# Altium PCB AMDDSP.PcbDoc (part 2 of 3)
Units mil, origin at the board's own origin, x right, y up, seen from the top; angles counter-clockwise.
Board outline 4736.22 x 5330.71 mil, 4 copper layers (Top Layer, GND, PWR, Bottom Layer); 286 components, 168 nets, 1027 pads, 408 vias.
Unrouted connection lines stored in the file: 126.
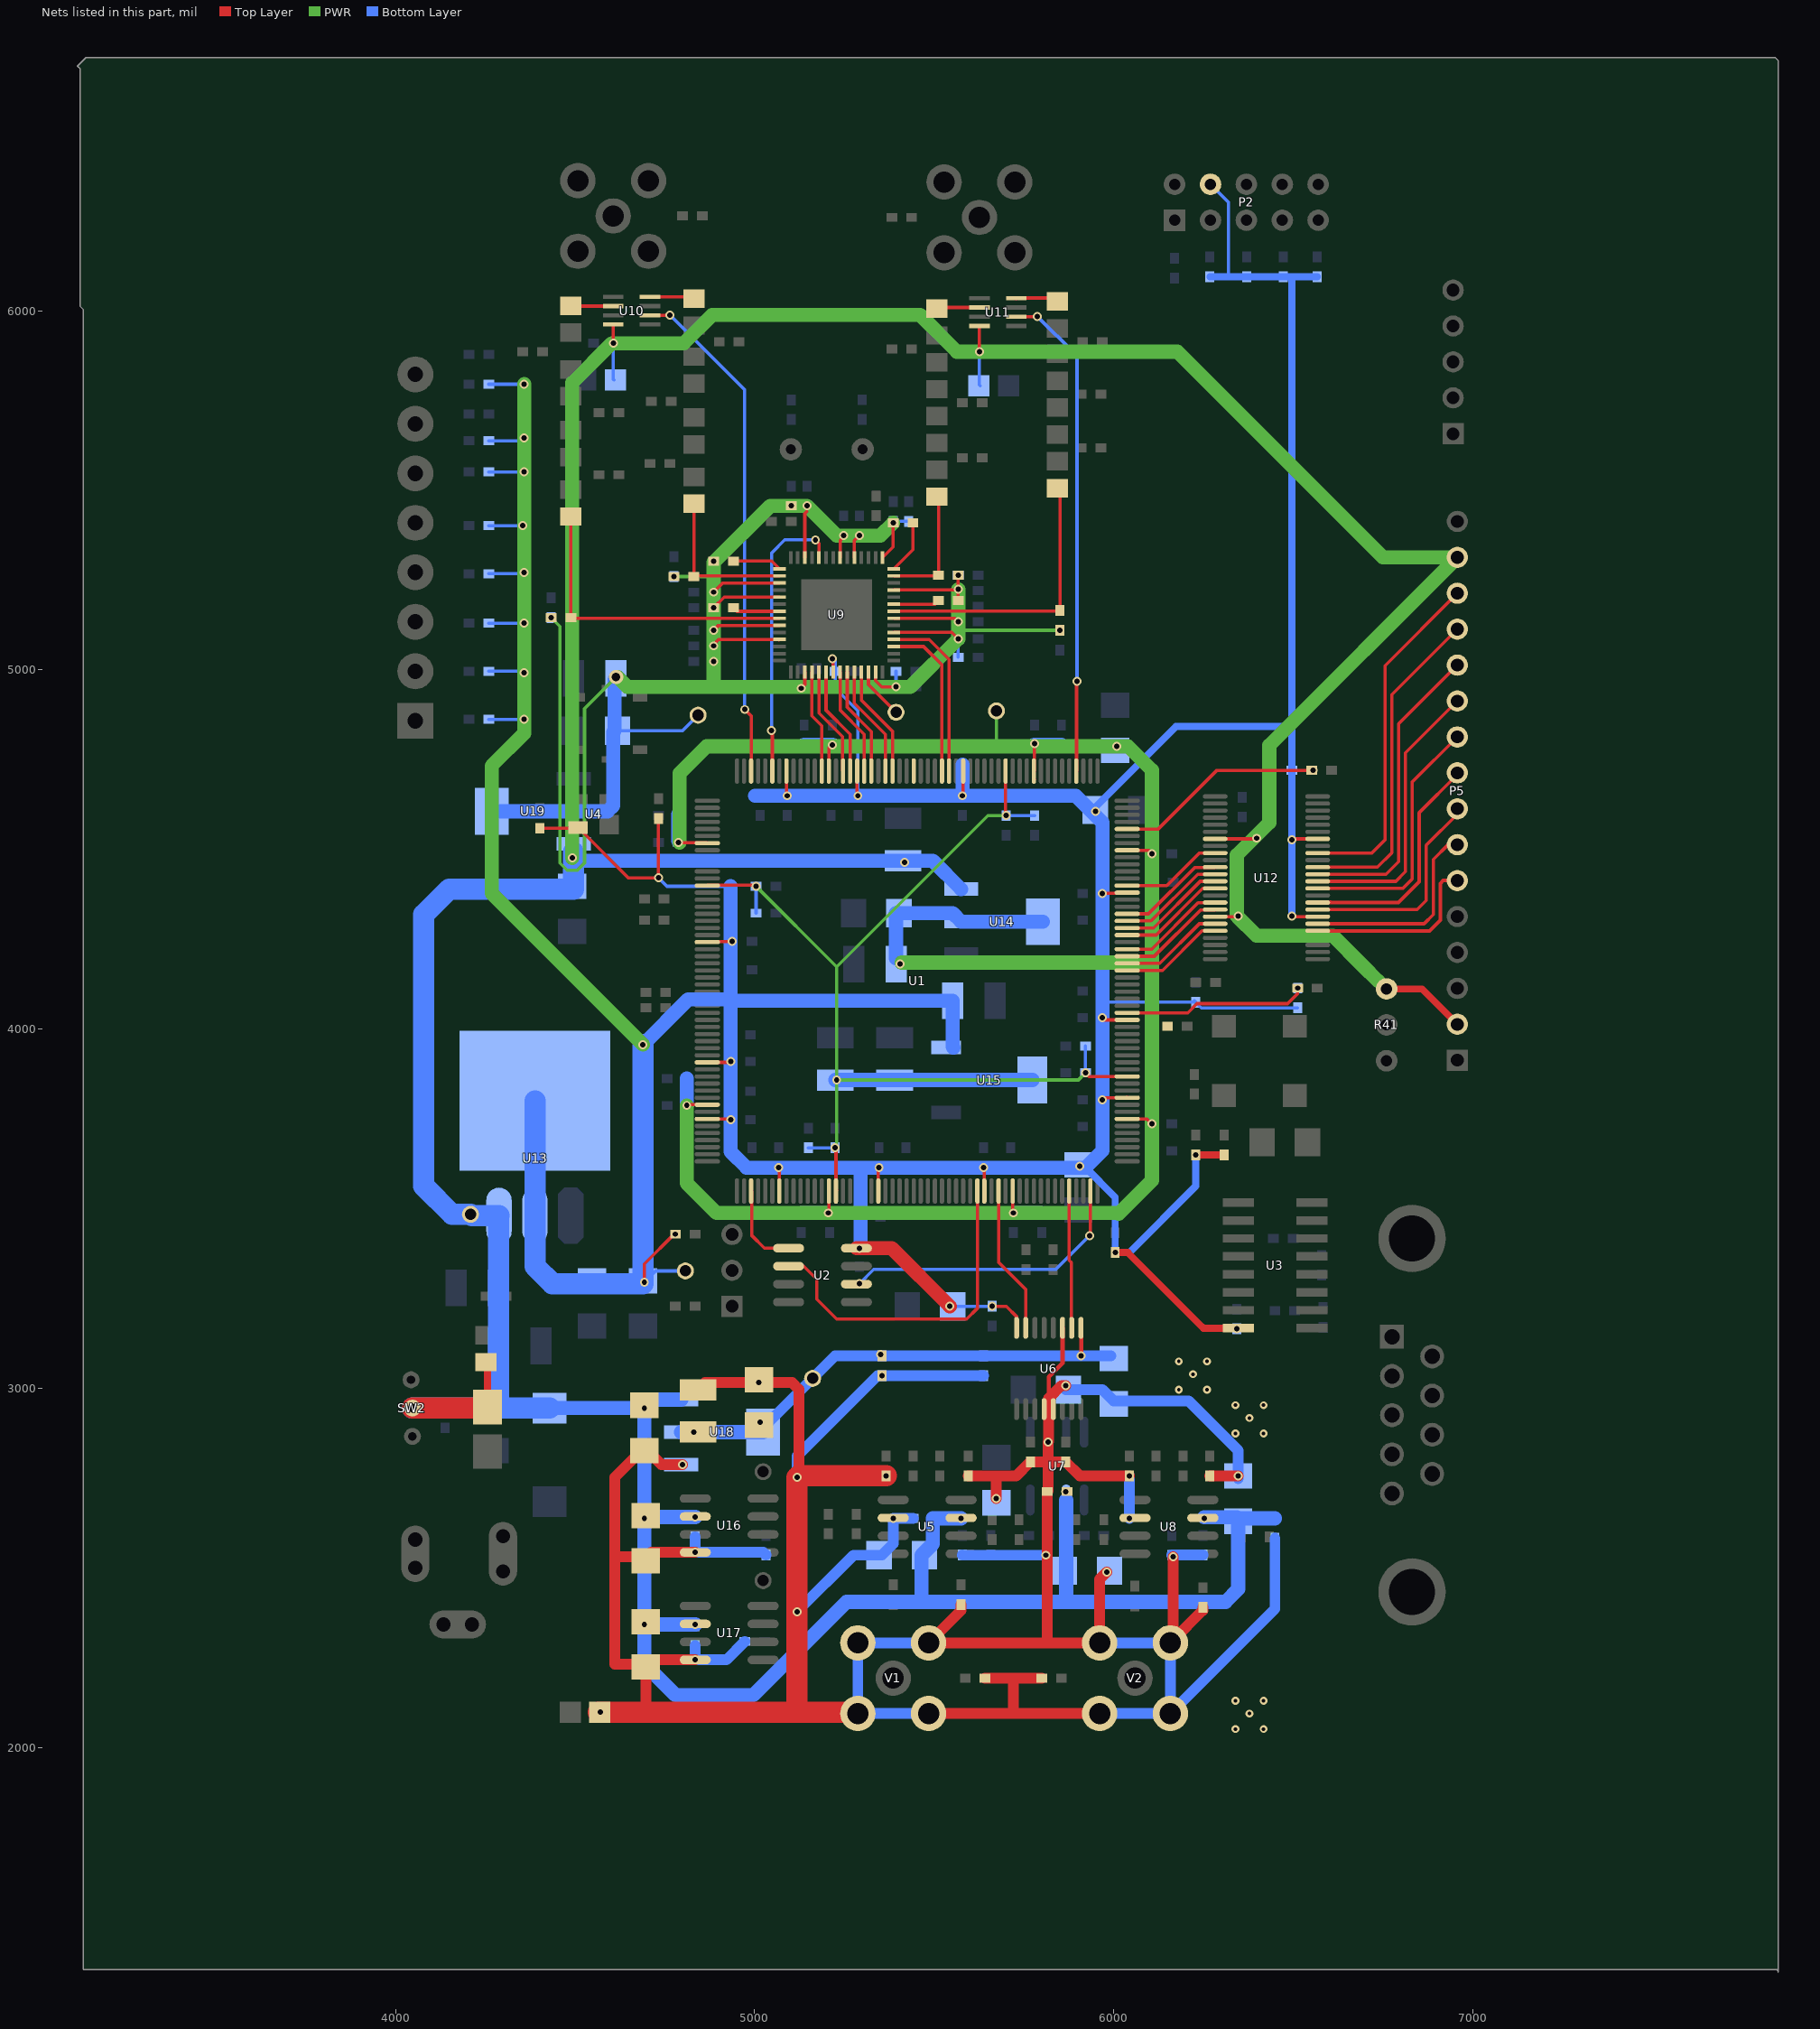
[diagram p4: the nets of this part, all layers, seen from the top]

## Part data
C1 C2 C3 C5 C6 C7 C8 C9 C10 C11 C13 C14 C15 C17 C18 C19 C20 C21 C22 C23 C24 C25 C26 C27 C28 C29 C30 C31 C32 C33 C34 C35 C36 C37 C38 C39 C40 C41 C42 C43 C44 C45 C46 C47 C48 C49 C50 C51 C52 C53 C54 C55 C56 C57 C58 C59 C60 C61 C63 C65 C68 C69 C70 C71 C75 C76 C77 C78 C79 C80 C81 C82 C83 C84 C85 C90 C91 C92 C93 C94 C95 C96 C97 C98 C99 C100 C113 C114 C115 C116 C117 C118 C119 C120 C121 C122 C123 C124 C125 C126 C127 C128 C136 C137 C138 C139 C140 C141 C142 C143 C147 C149 C151 C152 C154 C156 C159 C162 C163 C164 C165 C166 CF1 CF2 CF3 CF4: library part Cap, "Capacitor"
C4 C12 C16 C62 C64 C66 C67 C72 C73 C74 C86 C87 C88 C112 C129 C130 C131 C144 C145 C146 C148 C150 C153 C155 C157 C158 C160 C161 C167 C168 C169: library part "Cap Pol1", "Polarized Capacitor (Radial)"
CH1 CH2 V1 V2: "SMB Straight Connector"
D2: library part "Diode 10TQ035", "Schottky Rectifier"
J1: "Receptacle Assembly, 9 Position, Right Angle"
J2: library part PWR2.5, "Low Voltage Power Supply Connector"
L1 L2 L3 L4 L5 L6 L7 L8 L9 L10 L11 L12 L13 L14 L15 L16: library part Inductor, "Inductor"
P1: library part "Header 3", "Header, 3-Pin"
P2: "Header, 5-Pin, Dual row"
P3: library part "Header 8", "Header, 8-Pin"
P4: "Header, 5-Pin"
P5: "Header, 16-Pin"
R1 R2 R3 R4 R5 R6 R7 R8 R9 R10 R11 R12 R13 R14 R15 R16 R17 R18 R19 R20 R21 R22 R23 R24 R25 R26 R27 R28 R29 R30 R31 R32 R33 R34 R35 R36 R37 R38 R39 R40 R42 R43 R44 R45 R46 R47 R48 R49 R50 R51 R52 R53 R54 R55 R56 R57 RF1 RF2 RF3 RF4 RG1 RG3 RG4 RG6 RS1 RS2 RS3 RS4: library part Res1, "Resistor"
R41: library part "Res Tap", "Tapped Resistor"
SW1: library part "PUSHBUTTON SW"
SW2: library part SW-SPST, "Single-Pole, Single-Throw Switch"
TP_1 TP_2 TP_3 TP_4 TP_6 TP_7 TP_8 TP_9: library part "TEST POINT_0"
U1: "Spartan-3E 1.2V FPGA, 158 User I/Os, 208-Pin Pb-Free PQFP, Standard Performance, Commercial Grade"
U3: library part MAX3232
U4: library part MAX811
U5 U8: "Low Distortion  Differential ADC Driver"
U6: "Differential Input, Dual, Simultaneous  Sampling, 5 MSPS, 12-Bit, SAR ADC"
U7: library part AMP_OP727, "Precision Micropower  Single-Supply Operational Amplifiers"
U9: library part DDS_AD9959
U10 U11: "Single SPDT Switches"
U13: library part PWR_LM1117S-3.3
U14 U18: library part VOLTREG
U16 U17: library part PWR_ADR421, "Ultraprecision Low Noise, 2.048 V/2.500 V/  3.00 V/5.00 V XFET? Voltage References"
U19: library part PWR_LM1XXX, "5Vת3V3 10mA  DC/DC"
Y1: library part XTAL
Y2: library part XTAL, "Crystal Oscillator"

## Via types
v1: diameter 25, hole 15, Top Layer to Bottom Layer, tented both sides, 261 vias
v2: diameter 22, hole 10, Top Layer to Bottom Layer, tented bottom, 125 vias
v3: diameter 25.98, hole 12.99, Top Layer to Bottom Layer, tented top, 16 vias
v4: diameter 157.48, hole 118.11, Top Layer to Bottom Layer, tented both sides, 4 vias
v5: diameter 39.37, hole 23.62, Top Layer to Bottom Layer, tented both sides, 1 vias
v6: diameter 25, hole 15, Top Layer to Bottom Layer, tented bottom, 1 vias

## Nets (pads, with @x,y where several pads share a name; then routed paths per layer and width w, separated by ;. In a path a pad name is that pad's centre, name@x,y a point inside that pad or via, vN(x,y) a via of type N, cw(c..) or ccw(c..) an arc to the next point about the centre after c; other vN are vias at no path point)
1DIR_LCD: R35.1 R38.1 U1.126 | length 512.2
  Top Layer w9: U1.126@6037.4,4045.28 6206,4045.28 6231.59,4070.87 6484.25,4070.87 6511.81,4098.43 v1(6511.81,4114.17)
1V2: C136.2 C137.2 C138.2 C139.2 C140.2 C141.2 C142.2 C143.2 C145.1 C146.1 U1.13 U1.67 U1.117 U1.170 U15.2 U15.4 | length 3547.9
  Top Layer w9: U1.13@4868.11,4399.61 4869.52,4401.01 5000.56,4401.01 v1(5003.94,4397.64) ; v1@5226.38,3667.32 U1.67@5226.38,3549.21 U1.67@5227.78,3550.62 ; U1.170@5698.82,4718.5 5698.82,4596.46 v1(5700.79,4594.49) ; v1(5921.26,3877.95) 5931.1,3868.11 U1.117@6037.4,3868.11 U1.117@6036,3869.52
  PWR w9: v1(5003.94,4397.64) 5228.35,4173.23 ; v1(5224.41,3669.29) 5228.35,3673.23 v1(5228.35,3858.27) ; v1(5700.79,4594.49) 5649.61,4594.49 5228.35,4173.23 ; v1(5921.26,3877.95) 5901.57,3858.27 v1(5228.35,3858.27) ; v1(5228.35,3858.27) 5228.35,4173.23
  Bottom Layer w9: C136.2@5004.06,4322.83 C137.2@5004.06,4397.64 ; C138.2@5149.61,3669.41 C139.2@5224.41,3669.41 ; C143.2@5700.79,4594.37 C142.2@5779.53,4594.37 ; C140.2@5921.14,3877.95 C141.2@5921.14,3952.76
  Bottom Layer w39.37: C145.1@5224.41,3858.27 C146.1@5389.76,3858.27 U15.2@5533.46,3858.27 ; U15.2@5553.15,3858.27 U15.2@5533.46,3858.27 ; U15.4@5773.62,3858.27 U15.2@5533.46,3858.27
1V8: C18.1 C19.1 C20.1 C21.1 C22.1 C23.1 C24.1 C25.1 C26.1 C27.1 C28.1 C29.1 C30.1 C31.1 C32.1 C33.1 C34.1 C35.1 C36.1 C37.1 C38.1 C39.1 C41.1 C42.1 C43.1 C44.1 C168.1 C169.1 R21.2 R22.1 R23.2 R24.1 R25.1 R26.2 R27.1 R28.2 TP_9.1 U9.5 U9.7 U9.11 U9.15 U9.19 U9.21 U9.26 U9.31 U9.33 U9.37 U9.39 U9.45 U9.55 U19.2 U19.4 | length 7043.8
  Top Layer w9: v1@4885.83,5070.87 4899.61,5084.65 U9.39@5068.53,5084.65 ; v1(4885.83,5110.24) 4899.61,5124.02 U9.37@5068.9,5124.02 U9.37@5068.71,5123.83 ; v1(4885.83,5216.54) 4911.42,5242.13 U9.31@5068.9,5242.13 ; R23.2@4885.94,5173.23 4915.47,5202.76 U9.33@5068.9,5202.76 ; U9.39@5067.84,5083.96 U9.39@5068.53,5084.65 ; U9.39@5068.71,5084.83 U9.39@5068.53,5084.65 ; U9.39@5068.9,5084.65 U9.39@5068.53,5084.65 ; v1(5129.92,4948.82) 5139.76,4958.66 U9.45@5139.76,4994.09 ; U9.26@5139.76,5312.99 5139.76,5435.04 5145.67,5440.94 ; U9.21@5238.19,5312.99 5238.19,5360.24 v1@5248.03,5370.08 ; U9.19@5277.56,5312.99 5277.56,5360.24 v1(5291.34,5374.02) ; U9.55@5336.61,4994.09 5336.61,4970.47 5354.33,4952.76 v1(5393.7,4952.76) ; U9.15@5356.3,5312.99 5385.83,5342.52 v1(5385.83,5409.45) ; U9.5@5387.8,5104.33 5549.21,5104.33 v1(5566.93,5086.61) ; U9.7@5387.8,5143.7 5557.09,5143.7 v1(5566.93,5133.86) ; U9.11@5387.8,5222.44 v1@5564.96,5222.44 ; R24.1@5566.93,5192.91 v1(5566.93,5224.41) v1(5566.93,5263.78)
  PWR w9: v1(4433.07,5145.67) 4457.94,5120.8 4457.94,4462.22 4477.97,4442.19 4506.29,4442.19 4526.31,4462.22 4526.31,4892.45 v5(4614.17,4980.31) ; v1(4775.59,5259.84) 4881.89,5259.84 4885.83,5255.91 ; v1@5137.8,5456.69 v1(5145.67,5456.69) ; 5562.99,5110.24 5566.93,5110.24 v1(5850.39,5110.24)
  PWR w39.37: v5(4614.17,4980.31) 4618.11,4980.31 4645.67,4952.76 4885.83,4952.76 ; v1@4885.83,5027.56 v1(4885.83,5066.93) ; v1@5137.8,5456.69 v1(5102.36,5456.69) 5043.31,5456.69 4885.83,5299.21 4885.83,5255.91 v1(4885.83,5216.54) v1(4885.83,5173.23) v1(4885.83,5110.24) v1(4885.83,5066.93) ; v1(5145.67,5456.69) 5228.35,5374.02 v1(5248.03,5374.02) v1(5291.34,5374.02) 5350.39,5374.02 v1(5385.83,5409.45) ; v1(5566.93,5224.41) v1(5566.93,5133.86) 5566.93,5110.24 v1(5566.93,5086.61) 5433.07,4952.76 v1(5393.7,4952.76) 4885.83,4952.76 ; 4885.83,4952.76 v1(4885.83,5023.62) v1(4885.83,5066.93)
  Bottom Layer w9: C168.1@4610.24,4830.71 4799.21,4830.71 TP_9.1@4842.52,4874.02 ; v1(4885.83,5216.54) C33.1@4885.83,5259.84 ; v1(5102.36,5456.69) v1(5145.67,5456.69) ; v1(5129.92,4948.82) C26.1@5173.23,4948.82 ; C38.1@5385.83,5413.39 C41.1@5429.13,5413.39 ; v1(5393.7,4952.76) C25.1@5393.7,4996.06 ; C23.1@5566.93,5035.43 v1(5566.93,5086.61) ; C20.1@5566.93,5177.17 C19.1@5566.93,5220.47
  Bottom Layer w39.37: U19.4@4267.72,4606.3 U19.2@4496.06,4606.3 4590.55,4606.3 4606.3,4622.05 4606.3,4826.77 4610.24,4830.71 4610.24,4972.44 C169.1@4614.17,4976.38
  other v1: 4885.83,5303.15
2DIR_LCD: R34.1 R40.1 U1.152 | length 585.4
  Top Layer w9: U1.152@6037.4,4557.09 6124.02,4557.09 6287.4,4720.47 v1(6555.12,4720.47)
2V5: C112.1 C113.2 C114.2 C115.2 C116.2 C117.2 C118.2 C119.2 C120.2 C121.2 C122.2 C123.2 C124.2 C125.2 C126.2 C127.2 C128.2 C130.1 C131.1 TP_4.1 U1.7 U1.44 U1.66 U1.92 U1.111 U1.149 U1.166 U1.195 U14.2 U14.4 | length 6864
  Top Layer w9: v1(4787.4,4519.69) 4787.96,4519.12 4866.7,4519.12 U1.7@4868.11,4517.72 ; v1@4809.06,3789.37 U1.44@4883.86,3789.37 ; v1(5204.72,3488.19) 5206.69,3490.16 U1.66@5206.69,3549.21 ; U1.195@5206.69,4718.5 5206.69,4785.43 v1@5212.6,4791.34 ; v1@5718.5,3488.19 U1.92@5718.5,3549.21 ; U1.166@5777.56,4718.5 5777.56,4693.58 5777.77,4693.38 U1.166@5778.96,4694.58 ; U1.166@5778.96,4718.5 v1@5778.96,4794.71 ; U1.111@6037.4,3750 6092.52,3750 v1(6106.3,3736.22) ; U1.149@6037.4,4498.03 6096.46,4498.03 v1(6106.3,4488.19)
  PWR w9: 5673.22,4787.4 TP_4.1@5673.23,4885.83
  PWR w39.37: v1@4791.34,4519.69 4791.34,4712.6 4866.14,4787.4 5673.22,4787.4 6039.37,4787.4 6106.3,4720.47 v1(6106.3,4488.19) 6106.3,4188.98 ; v1(4811.02,3787.4) 4811.02,3570.87 4893.7,3488.19 v1(5204.72,3488.19) ; 5185.04,3488.19 v1(5720.47,3488.19) ; v1@5409.45,4185.04 6102.36,4185.04 6106.3,4188.98 ; v1@5724.41,3488.19 6015.75,3488.19 ; 6013.78,3486.22 6106.3,3578.74 v1(6106.3,3736.22) 6106.3,4188.98
  Bottom Layer w39.37: C113.2@4787.28,4523.62 C114.2@4787.28,4598.43 ; C116.2@4810.91,3787.4 C115.2@4810.91,3862.2 ; C118.2@5129.92,3488.07 C117.2@5204.72,3488.07 ; C127.2@5137.8,4791.46 C128.2@5216.54,4791.46 ; C131.1@5393.7,4196.85 5393.7,4322.83 5551.18,4322.83 U14.2@5574.8,4299.21 U14.4@5803.15,4299.21 ; C119.2@5720.47,3488.07 C120.2@5799.21,3488.07 ; C125.2@5779.53,4791.46 C126.2@5854.33,4791.46 ; C122.2@6106.42,3661.42 C121.2@6106.42,3736.22 ; C124.2@6106.42,4413.39 C123.2@6106.42,4488.19
  other v1: 5405.51,4181.1 6007.87,4787.4 5216.54,4791.34 5779.53,4795.28
2V5A: C45.1 C157.1 C159.1 C160.1 C161.1 TP_8.1 U6.9 U18.2 U18.4 | length 1370
  Top Layer w11.81: U6.9@5908.46,3168.31 5909.45,3167.32 v1(5909.45,3090.55)
  Bottom Layer w30: U18.4@5023.62,2877.95 5023.62,2889.76 5224.41,3090.55 C159.1@5637.8,3090.55 v1(5909.45,3090.55) C160.1@5992.13,3090.55
  Bottom Layer w39.37: U18.2@4795.28,2877.95 5019.69,2877.95 U18.4@5023.62,2877.95
  other v1: 4830.71,2877.95 5015.75,2905.51 5350.39,3094.49
3V3: C1.1 C2.1 C5.1 C46.1 C47.1 C68.2 C69.2 C70.2 C71.2 C72.1 C73.1 C74.1 C75.2 C76.2 C77.2 C78.2 C79.2 C80.2 C81.2 C82.2 C83.2 C84.2 C85.2 C87.1 C88.1 C90.2 C91.2 C92.2 C93.2 C94.2 C95.2 C96.2 C97.2 C98.2 C99.2 C100.2 C144.1 P2.4 R1.2 R2.1 R4.2 R5.1 R6.1 R9.2 R10.2 R11.2 R12.2 R13.1 R14.1 R34.2 R35.2 R36.2 R46.1 R47.1 R48.1 R49.1 R50.1 R51.1 TP_3.1 U1.21 U1.38 U1.46 U1.59 U1.73 U1.88 U1.114 U1.125 U1.143 U1.176 U1.191 U1.201 U2.8 U3.16 U4.4 U6.16 U9.49 U12.7 U12.18 U13.2 U13.4 U15.3 | length 17187
  Top Layer w9: R12.2@4401.57,4559.17 4506.09,4559.17 U4.4@4508.19,4561.28 4648.2,4421.26 v1(4732.28,4421.26) R13.1@4732.28,4586.61 ; v1(4692.91,3295.28) 4692.91,3346.34 R1.2@4777.68,3431.1 ; U1.21@4866.7,4243.53 U1.21@4868.11,4242.13 4869.52,4243.53 4937,4243.53 v1(4937.01,4244.09) ; U1.46@4868.11,3750 4931.1,3750 v1(4933.07,3748.03) ; U1.38@4868.11,3907.48 4931.1,3907.48 v1(4933.07,3909.45) ; v1(5066.93,3614.17) 5068.9,3612.2 U1.59@5068.9,3549.21 ; U1.201@5088.58,4718.5 5088.58,4651.57 v1(5090.55,4649.61) ; v1(5216.54,5031.5) 5218.5,5029.53 U9.49@5218.5,4994.09 ; U1.191@5285.43,4718.5 5285.43,4655.51 5287.4,4653.54 v1(5287.4,4649.61) ; U1.73@5344.49,3549.21 5344.49,3612.2 v1(5346.46,3614.17) ; v1@5580.71,4655.51 U1.176@5580.71,4718.5 ; v1(5637.8,3614.17) 5639.76,3612.2 U1.88@5639.76,3549.21 ; v1(5661.42,3228.35) 5700.79,3228.35 5729.33,3199.8 U6.16@5729.33,3168.31 ; v1(5968.5,3803.15) 5974.41,3809.06 U1.114@6037.4,3809.06 U1.114@6036,3810.46 ; v1(5968.5,4031.5) 5974.41,4025.59 U1.125@6037.4,4025.59 ; v1@5969.07,4378.52 6036,4378.52 U1.143@6037.4,4379.92 ; v1@6501.97,4529.53 U12.18@6567.91,4529.53 6579.72,4529.53 U12.18@6534.44,4529.53 ; v1@6505.91,4312.99 6579.72,4312.99 U12.7@6534.44,4312.99
  Top Layer w19.68: v1(6003.94,3377.95) 6039.37,3377.95 6248.03,3169.29
  Top Layer w20: v1(6228.35,3649.61) R2.1@6307.09,3649.61 ; 6248.03,3169.29 6250.12,3167.2 U3.16@6346.85,3167.2
  Top Layer w39.37: U2.8@5283.46,3389.96 5381.69,3389.96 v1(5543.31,3228.35)
  PWR w39.37: v1(4358.27,5795.28) v1(4358.27,5645.67) v1(4358.27,5551.18) v1(4358.27,5271.65) v1(4358.27,5129.92) v1(4358.27,4992.13) v1(4358.27,4862.2) 4358.27,4823.42 4267.72,4732.87 4267.72,4377.95 v1(4688.98,3956.69)
  Bottom Layer w9: R51.1@4259.84,4862.2 v1(4358.27,4862.2) ; R50.1@4259.84,4996.06 4354.33,4996.06 v1(4358.27,4992.13) ; R49.1@4259.84,5129.92 v1(4358.27,5129.92) ; R48.1@4259.84,5267.72 v1@4354.33,5267.72 ; R47.1@4259.84,5401.57 v1(4354.33,5401.57) ; R46.1@4259.84,5551.18 v1(4358.27,5551.18) ; R6.1@4259.84,5637.8 4350.39,5637.8 v1(4358.27,5645.67) ; R5.1@4259.84,5795.28 v1(4358.27,5795.28) ; C87.1@4688.98,3291.34 v1(4692.91,3295.28) 4724.41,3326.77 TP_3.1@4807.09,3326.77 ; v1(4732.28,4421.26) 4755.91,4397.63 4933.07,4397.63 ; v1(4933.07,3748.03) 4933.07,3738.19 C69.2@4933.19,3738.19 ; C77.2@4933.07,3984.37 C77.2@4933.19,3984.25 ; v1(5066.93,3614.17) C71.2@5066.93,3614.29 ; C99.2@5082.56,4649.49 C99.2@5090.55,4649.49 v1(5090.55,4649.61) ; v1(5216.54,5031.5) 5224.41,5023.62 C46.1@5224.41,4996.06 C47.1@5224.41,4948.82 5287.4,4885.83 v1(5287.4,4649.61) C97.2@5287.4,4649.49 ; v1(5346.46,3614.17) C79.2@5346.46,3614.29 ; v1(5543.31,3228.35) 5543.43,3228.23 C85.2@5661.42,3228.23 ; v1(5637.8,3614.17) C81.2@5637.8,3614.29 ; 5968.39,4074.8 5968.5,4074.92 R36.2@6228.35,4074.92 ; v1(5968.5,3803.15) C83.2@5968.5,3805.12 ; R36.2@6224.53,4078.74 R36.2@6228.35,4074.92 ; P2.4@6269.29,6351.97 6318.9,6302.36 6318.9,6098.54 6322.83,6094.61 ; R35.2@6511.81,4059.17 6244.09,4059.17 R36.2@6228.35,4074.92
  Bottom Layer w19.68: C73.1@5921.38,3614.29 6003.94,3531.73 v1(6003.94,3377.95) 6043.31,3377.95 6228.35,3562.99 v1(6228.35,3649.61) ; C74.1@5937.01,4606.3 6173.23,4842.52 6488.19,4842.52 6496.06,4850.39 ; R9.2@6267.72,6094.61 6322.83,6094.61 R10.2@6370.08,6094.61 C100.2@6472.44,6094.61 6496.06,6094.61 ; v1@6496.06,4318.9 v1(6496.06,4527.56) 6496.06,4720.35 R34.2@6496.18,4720.47 ; R34.2@6496.06,4728.35 6496.06,4850.39 ; R11.2@6566.93,6094.61 6496.06,6094.61 ; 6496.06,4850.39 6496.06,6094.61
  Bottom Layer w39.37: v1(4688.98,3956.69) 4814.96,4082.68 4933.07,4082.68 4933.07,4240.16 4933.07,4314.84 ; 4933.07,4318.9 4933.07,4397.63 ; 4933.19,4062.99 C77.2@4933.19,3984.25 C78.2@4933.19,3909.45 C68.2@4933.19,3826.77 C69.2@4933.19,3748.03 4933.19,3738.19 4933.19,3658.75 4977.65,3614.29 C70.2@4992.13,3614.29 C71.2@5066.93,3614.29 5295.28,3614.29 ; 4948.94,4078.74 C144.1@5551.18,4078.74 5551.18,3950.39 U15.3@5553.15,3948.43 ; 5001.39,4649.61 5015.63,4649.61 C98.2@5015.75,4649.49 C99.2@5090.55,4649.49 C96.2@5212.6,4649.49 C97.2@5287.4,4649.49 C94.2@5574.8,4649.49 ; R4.2@5295.28,3397.52 5295.28,3614.29 ; C95.2@5578.74,4736.34 v1(5578.74,4649.61) C94.2@5578.74,4649.49 5893.82,4649.49 5937.01,4606.3 5968.5,4574.8 C92.2@5968.5,4385.71 ; C92.2@5968.39,4377.95 C90.2@5968.39,4106.3 5968.39,4074.8 C91.2@5968.39,4031.5 C83.2@5968.39,3805.12 ; C83.2@5968.5,3805.12 C83.2@5968.39,3805.12 ; 5295.28,3614.29 C79.2@5346.46,3614.29 C80.2@5421.26,3614.29 C81.2@5637.8,3614.29 C82.2@5712.6,3614.29 5921.38,3614.29 5968.39,3661.3 C84.2@5968.39,3728.35 C83.2@5968.39,3803.15 C83.2@5968.39,3805.12
  Bottom Layer w59.05: U13.4@4388.19,3800.32 U13.2@4388.19,3480.32 4388.19,3340.16 4437.01,3291.34 4547.24,3291.34 4688.98,3291.34 v1(4688.98,3956.69)
  other v1: 6342.52,3165.35 5291.34,3389.76 4779.53,3429.13 5905.51,3618.11 6496.06,4314.96 5968.5,4377.95 5948.82,4606.3
A_LCD: C12.1 C16.1 C61.1 C62.1 C63.1 C64.1 C65.1 C66.1 C67.1 C86.1 C129.1 C149.1 C150.1 C152.1 C153.1 C158.1 C162.1 C163.1 C164.1 C165.1 C166.1 C167.1 D1.1 D2.2 P5.2 P5.15 R41.2 SW2.2 TP_2.1 U5.3 U7.6 U8.3 U10.4 U11.4 U12.31 U12.42 U13.3 U14.3 U16.2 U17.2 U18.3 U19.3 | length 14696.4
  Top Layer w9: v1(4606.3,5909.45) U10.4@4606.3,5961.61 ; v1(5625.98,5885.83) U11.4@5625.98,5957.68 ; U12.42@6282.48,4312.99 6344.49,4312.99 v1(6346.46,4314.96) ; U12.31@6282.48,4529.53 v1@6395.67,4529.53
  Top Layer w19.68: D1.1@4251.97,3072.83 4255.91,3068.9 D2.2@4255.91,2947.83 ; R41.2@6759.84,4111.81 6858.27,4111.81 P5.2@6956.69,4013.39
  Top Layer w59.06: SW2.2@4047.24,2944.88 4252.95,2944.88 D2.2@4255.91,2947.83
  PWR w39.37: v1(4492.13,4476.38) 4492.13,5799.21 4602.36,5909.45 v1(4606.3,5909.45) 4803.15,5909.45 4881.89,5988.19 5460.63,5988.19 5562.99,5885.83 v1(5625.98,5885.83) 6177.17,5885.83 6749.61,5313.39 P5.15@6956.69,5313.39 6433.07,4789.76 6433.07,4574.8 6342.52,4484.25 v1@6342.52,4314.96 ; v1@6344.49,4312.99 6397.64,4259.84 6610.24,4259.84 6692.91,4177.17 6736.22,4133.86
  Bottom Layer w9: v1(4606.3,5909.45) 4606.3,5809.06 C166.1@4608.27,5807.09 ; v1(5625.98,5885.83) 5625.98,5793.31 C164.1@5627.95,5791.34
  Bottom Layer w39.37: C16.1@4429.13,2944.88 v1(4692.91,2944.88) ; 4492.13,4496.06 4496.06,4492.13 4501.97,4486.22 ; 4519.69,4468.5 C129.1@5413.39,4468.5 5496.06,4468.5 U14.3@5574.8,4389.76 ; v1(4692.91,2637.8) v1(4692.91,2342.52) ; v1@4692.91,2645.67 v1(4692.91,2944.88) ; v1@4696.85,2641.73 v1(4834.65,2641.73) ; U18.3@4795.28,2968.5 4716.54,2968.5 v1(4692.91,2944.88) ; v1(4834.65,2342.52) v1(4692.91,2342.52) ; v1(5574.8,2637.8) C61.1@5496.06,2637.8 5496.06,2566.93 5464.57,2535.43 5464.57,2417.33 5452.74,2405.51 ; U7.6@5867.52,2688.98 5867.52,2418.7 5854.33,2405.51 ; v1@6251.97,2641.39 6342.86,2641.39 C64.1@6346.46,2637.8 ; C63.1@6448.82,2637.8 C64.1@6346.46,2637.8 ; v1(4692.91,2342.52) 4692.91,2232.28 4779.53,2145.67 4996.15,2145.67 5255.99,2405.51 5452.74,2405.51 ; 5452.74,2405.51 5854.33,2405.51 ; 5854.33,2405.51 6311.02,2405.51 6346.46,2440.94 C64.1@6346.46,2637.8
  Bottom Layer w59.06: SW2.2@4047.24,2944.88 C162.1@4137.8,2944.88 C67.1@4275.59,2944.88 ; C16.1@4429.13,2944.88 C67.1@4275.59,2944.88 ; 4496.06,4492.13 4496.06,4389.76 4492.13,4389.76 4149.61,4389.76 4078.74,4318.9 4078.74,3562.99 4157.48,3484.25 TP_2.1@4208.66,3484.25 4212.6,3480.32 U13.3@4288.19,3480.32 4287.4,3479.53 C86.1@4287.4,3279.53 C12.1@4287.4,3118.11 4287.4,2956.69 C67.1@4275.59,2944.88
  other v1: 6251.97,2637.8 5866.14,2712.6 5417.32,4464.57 6397.64,4531.5
AD_C\S\: U1.100 U6.10 | length 383.8
  Top Layer w9: U1.100@5875.98,3549.21 5875.98,3356.3 5881.89,3350.39 5881.89,3169.29 U6.10@5882.87,3168.31
AD_SCLK: U1.90 U6.15 | length 412.3
  Top Layer w9: U1.90@5679.13,3549.21 5679.13,3350.98 5754.92,3275.19 U6.15@5754.92,3168.31
AGND: C10.2 C11.2 C13.2 C14.2 C15.2 C17.2 C45.2 C61.2 C62.2 C63.2 C64.2 C65.2 C66.2 C147.2 C148.2 C149.2 C150.2 C151.2 C152.2 C153.2 C154.2 C155.2 C156.2 C157.2 C158.2 C159.2 C160.2 C161.2 R17.1 R20.1 R43.1 R44.2 R45.2 RG3.2 RG6.2 U5.6 U6.4 U6.5 U6.11 U7.2 U8.6 U16.4 U17.4 U18.1 V1.2 V2.2 | length 11491.3
  Top Layer w11.81: 5818.9,2944.88 5818.9,2952.76 ; 5818.9,2972.26 5818.9,3031.5 5857.28,3069.88 U6.11@5857.28,3168.31
  Top Layer w30: 4696.85,2098.43 C153.2@4696.85,2232.28 ; C158.2@4704.53,2846.26 C158.2@4692.91,2834.65 ; v1(4799.21,2787.4) 4740.16,2787.4 C158.2@4692.91,2834.65 ; U17.4@4834.65,2243.9 4708.46,2243.9 C153.2@4696.85,2232.28 ; U16.4@4834.65,2543.11 4712.4,2543.11 4696.85,2527.56 4692.91,2531.5 4610.24,2531.5 ; C161.2@4842.52,2996.06 4862.2,3015.75 v1(5011.81,3015.75) 5104.47,3015.75 5123.1,2997.12 5123.1,2756.97 5122.16,2756.02 v1(5118.11,2751.97) ; V1.2@5484.25,2094.49 5720.46,2094.49 ; RG3.2@5574.8,2397.76 5574.8,2381.89 V1.2@5484.25,2291.34 5811.02,2291.34 ; C11.2@5594.49,2756.02 5669.28,2756.02 ; R44.2@5641.61,2192.91 5720.47,2192.91 ; v1(5673.23,2692.91) 5673.23,2752.08 5669.28,2756.02 ; R45.2@5799.33,2192.91 5720.47,2192.91 ; 5818.9,2944.88 5818.9,2851.77 v1(5817.52,2850.39) 5817.52,2795.39 ; 5818.9,2952.76 5818.9,2972.26 5854.51,3007.87 v1(5866.14,3007.87) ; V2.2@5960.63,2094.49 5720.46,2094.49 ; v1(5980.31,2488.19) 5960.63,2468.5 V2.2@5960.63,2291.34 5811.02,2291.34 ; C14.2@6043.31,2756.02 5905.51,2756.02 C151.2@5866.14,2795.39 5817.52,2795.39 ; V2.2@6157.48,2291.34 V2.2@6165.35,2299.21 ; v1(6165.35,2531.5) V2.2@6165.35,2299.21 ; RG6.2@6248.03,2389.88 6248.03,2381.89 V2.2@6165.35,2299.21 ; C15.2@6267.72,2756.02 6346.34,2756.02 v1(6346.46,2755.91) ; 4610.24,2531.5 4610.24,2232.28 C153.2@4696.85,2232.28 ; 4610.24,2531.5 4610.24,2751.97 C158.2@4692.91,2834.65 ; 5669.28,2756.02 5728.35,2756.02 C154.2@5767.72,2795.39 5817.52,2795.39 ; 5720.46,2094.49 5720.46,2192.9 ; 5811.02,2291.34 5815.08,2295.39 C65.2@5815.08,2712.6 5817.52,2715.04 5817.52,2795.39
  Top Layer w59.06: R43.1@4564.96,2098.43 4696.85,2098.43 5118.1,2098.43 ; v1(5118.11,2751.97) 5118.1,2098.43 ; v1@5122.16,2756.02 C10.2@5366.14,2756.02 ; V1.2@5287.4,2094.49 5283.46,2098.43 5118.1,2098.43
  Bottom Layer w30: C152.2@4834.65,2283.58 v1(4834.65,2244.09) 4921.38,2244.09 C156.2@4972.56,2295.28 ; C149.2@4834.65,2586.73 v1(4834.65,2543.31) 5023.74,2543.31 C147.2@5031.5,2535.55 ; v1(5118.11,2377.95) 5275.59,2535.43 5354.33,2535.43 5385.83,2566.93 v1(5385.83,2637.8) C61.2@5441.06,2637.8 ; v1(5118.11,2751.97) 5118.11,2811.02 5342.64,3035.55 C159.2@5637.8,3035.55 ; V1.2@5484.25,2094.49 V1.2@5287.4,2094.49 V1.2@5287.4,2291.34 V1.2@5484.25,2291.34 ; C13.2@5578.74,2535.55 5578.86,2535.43 R17.1@5657.48,2535.43 v1(5811.02,2535.43) ; C148.2@5866.14,2996.06 5968.5,2996.06 6000,2964.57 6208.66,2964.57 6346.46,2826.77 v1(6346.46,2755.91) C64.2@6346.46,2748.03 ; V2.2@5960.63,2094.49 V2.2@6157.48,2094.49 ; V2.2@5960.63,2291.34 V2.2@6157.48,2291.34 V2.2@6157.48,2094.49 ; v1(6043.31,2637.8) v1(6043.31,2755.91) ; R20.1@6161.42,2535.43 6161.54,2535.55 C17.2@6248.03,2535.55 ; C63.2@6448.82,2582.8 6448.82,2385.83 V2.2@6157.48,2094.49
  other v1: 4570.87,2098.43 5366.14,2755.91 5354.33,3035.43
  other v2: 6338.58,2051.18 6417.32,2051.18 6377.95,2094.49 6338.58,2129.92 6417.32,2129.92 6338.58,2874.02 6417.32,2874.02 6377.95,2917.32 6338.58,2952.76 6417.32,2952.76 6181.1,2996.06 6259.84,2996.06 6220.47,3039.37 6181.1,3074.8 6259.84,3074.8
C\H\0\_\I\O\U\T\: R28.1 U9.29 | length 136.9
  Top Layer w9: R28.1@4940.94,5303.15 5047.24,5303.15 U9.29@5068.9,5281.5
C\H\1\_\I\O\U\T\: R23.1 U9.35 | length 132
  Top Layer w10: R23.1@4940.94,5173.23 4950.79,5163.39 U9.35@5068.9,5163.39
C\H\2\_\I\O\U\T\: R24.2 U9.9 | length 128.2
  Top Layer w9: U9.9@5387.8,5183.07 5502.09,5183.07 R24.2@5511.93,5192.91
C\H\3\_\I\O\U\T\: R27.2 U9.14 | length 149.9
  Top Layer w9: U9.14@5387.8,5281.5 5440.83,5334.53 R27.2@5440.83,5409.45
CH0_100M: L4.2 U10.8 | length 124.1
  Top Layer w9: U10.8@4708.66,6038.39 4825.79,6038.39 L4.2@4830.71,6033.46
CH0_IOUT: L1.1 R26.1 U9.30 | length 441.8
  Top Layer w9: L1.1@4830.71,5462.6 R26.1@4830.71,5259.84 4832.68,5261.81 U9.30@5068.9,5261.81
CH1_4M: L12.2 U10.2 | length 118.5
  Top Layer w9: L12.2@4488.19,6013.78 4489.17,6012.8 U10.2@4606.3,6012.8
CH1_IOUT: L9.1 R21.1 U9.36 | length 872.9
  Top Layer w9: L9.1@4488.19,5427.17 R21.1@4488.19,5145.67 4490.16,5143.7 4606.29,5143.7 ; 4596.46,5143.7 4606.29,5143.7 ; U9.36@5068.9,5143.7 4606.29,5143.7
CH2_100M: U11.8
CH2_IOUT: L5.1 R22.2 U9.8 | length 811.3
  Top Layer w9: U9.8@5387.8,5163.39 5848.54,5163.39 5850.51,5161.42 5850.51,5497.91 L5.1@5842.52,5505.91
CH3_4M: L16.2 U11.2 | length 120.9
  Top Layer w10: L16.2@5507.87,6005.91 5510.83,6008.86 U11.2@5625.98,6008.86 ; L16.2@5511.81,6007.76 L16.2@5512.91,6008.86
CH3_100M: L8.2 | length 104
  Top Layer w10: 5728.35,6034.45 5729.27,6035.37 5830.65,6035.37 L8.2@5830.71,6035.31
  Top Layer w15.75: L8.2@5829.84,6034.45 L8.2@5830.71,6035.31
CH3_IOUT: L13.1 R25.2 U9.13 | length 345.1
  Top Layer w9: U9.13@5387.8,5261.81 5509.96,5261.81 R25.2@5511.93,5263.78 5511.93,5478.23 L13.1@5507.87,5482.28
CLK_FLASH: U1.103 U2.6 | length 820
  Top Layer w9: v1@5935.04,3427.17 U1.103@5935.04,3549.21
  Bottom Layer w9: v1(5933.07,3425.2) 5838.58,3330.71 5331.47,3330.71 v1@5292.1,3291.34 ; v1@5292.1,3291.34 v1(5291.34,3291.34) v1@5292.1,3291.34
CLK_FPGA_50M: R3.2 U1.183 | length 2.8
  Top Layer w9: R3.2@6147.76,4005.91 R3.2@6149.72,4007.87
CSO_B_FLASH: U1.55 U2.1 | length 241.8
  Top Layer w9: U1.55@4990.16,3549.21 4991.56,3547.81 4991.56,3425.76 5027.36,3389.96 U2.1@5094.49,3389.96
CTL_MES: U1.206 U10.6 | length 1389.8
  Top Layer w9: U10.6@4708.66,5987.2 4762.8,5987.2 v1(4763.78,5988.19) ; v1(4972.44,4889.76) 4991.31,4870.89 U1.206@4991.31,4748.17
  Bottom Layer w9: v1(4763.78,5988.19) 4972.44,5779.53 4972.44,5027.56 v1(4972.44,4889.76)
CTL_REF: U1.160 U11.6 | length 1370.3
  Top Layer w10: U11.6@5728.35,5983.27 v1@5786.42,5983.27 ; U1.160@5895.67,4718.5 5896.57,4719.41 5896.57,4967.44 v1(5897.64,4968.5)
  Bottom Layer w10: v1(5787.4,5984.25) 5893.7,5877.95 ; v1@5893.7,4972.44 v1(5897.64,4968.5) ; v1@5897.64,4972.44 5897.64,5877.95
DB0_FPGA_LCD: U1.133 U12.43 | length 290.7
  Top Layer w9: U1.133@6037.4,4183.07 6127.95,4183.07 6238.19,4293.31 U12.43@6282.48,4293.31
DB0_LCD: P5.7 U12.6 | length 573.8
  Top Layer w9: U12.6@6567.91,4293.31 6864.17,4293.31 6889.76,4318.9 6889.76,4440.94 ; 6889.76,4444.88 6889.76,4440.94 ; P5.7@6956.69,4513.39 6930.71,4513.39 6889.76,4472.44 6889.76,4440.94
DB1_FPGA_LCD: U1.134 U12.41 | length 298.9
  Top Layer w9: U1.134@6037.4,4202.76 6112.7,4202.76 6241.93,4331.99 6281.8,4331.99 U12.41@6282.48,4332.68
DB1_LCD: P5.8 U12.8 | length 603.8
  Top Layer w9: U12.8@6567.91,4332.68 6844.49,4332.68 6870.08,4358.27 6870.08,4511.81 6956.69,4598.43 P5.8@6956.69,4613.39
DB2_FPGA_LCD: U1.135 U12.40 | length 298.9
  Top Layer w9: U1.135@6037.4,4222.44 6105.51,4222.44 6234.75,4351.68 6281.8,4351.68 U12.40@6282.48,4352.36
DB2_LCD: P5.9 U12.9 | length 696.1
  Top Layer w9: 6603.67,4354.64 6601.39,4352.36 U12.9@6567.91,4352.36 6792.62,4352.36 6850.39,4410.14 6850.39,4602.36 6956.69,4708.66 P5.9@6956.69,4713.39 P5.9@6956.69,4707.67
DB3_FPGA_LCD: U1.137 U12.38 | length 298.9
  Top Layer w9: U1.137@6037.4,4261.81 6118.01,4261.81 6247.93,4391.73 U12.38@6282.48,4391.73
DB3_LCD: P5.10 U12.11 | length 721.6
  Top Layer w9: U12.11@6567.91,4391.73 6805.12,4391.73 6831.22,4417.83 6831.22,4687.91 P5.10@6956.69,4813.39
DB4_FPGA_LCD: U1.138 U12.37 | length 298.9
  Top Layer w9: U1.138@6037.4,4281.5 6110.83,4281.5 6240.75,4411.42 U12.37@6282.48,4411.42
DB4_LCD: P5.11 U12.12 | length 790.4
  Top Layer w9: U12.12@6567.91,4411.42 6785.43,4411.42 6812.22,4438.2 6812.22,4768.91 P5.11@6956.69,4913.39
DB5_FPGA_LCD: U1.139 U12.36 | length 298.9
  Top Layer w9: U1.139@6037.4,4301.18 6103.64,4301.18 6233.56,4431.1 U12.36@6282.48,4431.1
DB5_LCD: P5.12 U12.13 | length 854.6
  Top Layer w9: U12.13@6567.91,4431.1 6757.87,4431.1 6793.22,4466.45 6793.22,4849.91 P5.12@6956.69,5013.39
DB6_FPGA_LCD: U1.140 U12.35 | length 298.9
  Top Layer w9: U1.140@6037.4,4320.87 6096.46,4320.87 6225.69,4450.1 6281.8,4450.1 U12.35@6282.48,4450.79
DB6_LCD: P5.13 U12.14 | length 921.1
  Top Layer w9: U12.14@6567.91,4450.79 6734.25,4450.79 6774.22,4490.76 6774.22,4930.91 P5.13@6956.69,5113.39
DB7_FPGA_LCD: U1.144 U12.33 | length 282.6
  Top Layer w9: U1.144@6037.4,4399.61 6147.64,4399.61 6237.5,4489.47 6281.8,4489.47 U12.33@6282.48,4490.16
DB7_LCD: P5.14 U12.16 | length 972.5
  Top Layer w9: U12.16@6567.91,4490.16 6718.5,4490.16 6755.22,4526.87 6755.22,5011.91 P5.14@6956.69,5213.39
DDS_\C\S\: U1.193 U9.47 | length 303.3
  Top Layer w9: U9.47@5179.13,4994.09 5179.13,4879.92 5244.66,4814.4 5244.66,4719.91 U1.193@5246.06,4718.5
DDS_CLK_MODE_SEL: U1.203 U9.24 | length 798.2
  Top Layer w9: v1(5047.24,4830.71) 5049.21,4828.74 U1.203@5049.21,4718.5 ; v1(5169.29,5362.2) 5179.13,5352.36 U9.24@5179.13,5312.99
  Bottom Layer w9: v1@5047.8,4830.71 5047.8,5326.14 5083.86,5362.2 v1(5169.29,5362.2)
DDS_IO_UPDATE: U1.196 U9.46 | length 287
  Top Layer w9: U9.46@5159.45,4994.09 5159.45,4872.05 5187.01,4844.49 U1.196@5187.01,4718.5
DDS_MASTER_RESET: U1.179 U9.3 | length 450.3
  Top Layer w9: U9.3@5387.8,5064.96 5470.47,5064.96 5521.65,5013.78 U1.179@5521.65,4718.5
DDS_PWR_DWN_CTL: U1.178 U9.4 | length 487.4
  Top Layer w9: U9.4@5387.8,5084.65 5486.22,5084.65 5541.34,5029.53 U1.178@5541.34,4718.5
DDS_S_CLK: U1.192 U9.48 | length 303.3
  Top Layer w9: U9.48@5198.82,4994.09 5198.82,4887.8 5265.75,4820.87 U1.192@5265.75,4718.5
DDS_SDIO_0: U1.190 U9.50 | length 303.3
  Top Layer w9: U9.50@5238.19,4994.09 5238.19,4887.8 5305.12,4820.87 U1.190@5305.12,4718.5
DDS_SDIO_1: U1.189 U9.51 | length 302.9
  Top Layer w9: U9.51@5257.87,4994.09 5257.87,4895.67 5325.49,4828.06 U1.189@5325.49,4719.19
DDS_SDIO_2: U1.187 U9.52 | length 311.5
  Top Layer w9: U9.52@5277.56,4994.09 5277.56,4907.48 5364.17,4820.87 U1.187@5364.17,4718.5
DDS_SDIO_3: U1.186 U9.53 | length 311.5
  Top Layer w9: U9.53@5297.24,4994.09 5297.24,4915.35 5383.86,4828.74 U1.186@5383.86,4718.5
DDS_SYNC_CLK: TP_1.1 U9.54 | length 144
  Top Layer w9: U9.54@5316.93,4994.09 5316.93,4958.66 TP_1.1@5393.7,4881.89
DIN_FLASH: U1.87 U2.2 | length 957.8
  Top Layer w9: U2.2@5094.49,3339.96 5136.42,3339.96 5173.23,3303.15 5173.23,3248.03 5228.35,3192.91 5590.55,3192.91 5620.08,3222.44 U1.87@5620.08,3549.21
E_FPGA_LCD: U1.132 U12.44 | length 290.7
  Top Layer w9: U1.132@6037.4,4163.39 6135.83,4163.39 6246.06,4273.62 U12.44@6282.48,4273.62
E_LCD: P5.6 U12.5 | length 518.4
  Top Layer w10: U12.5@6567.91,4273.62 6879.92,4273.62 6909.45,4303.15 6909.45,4405.51 6917.32,4413.39 P5.6@6956.69,4413.39 P5.6@6956.69,4401.57